# EAGLE board supply (EAGLE 9.6.1)
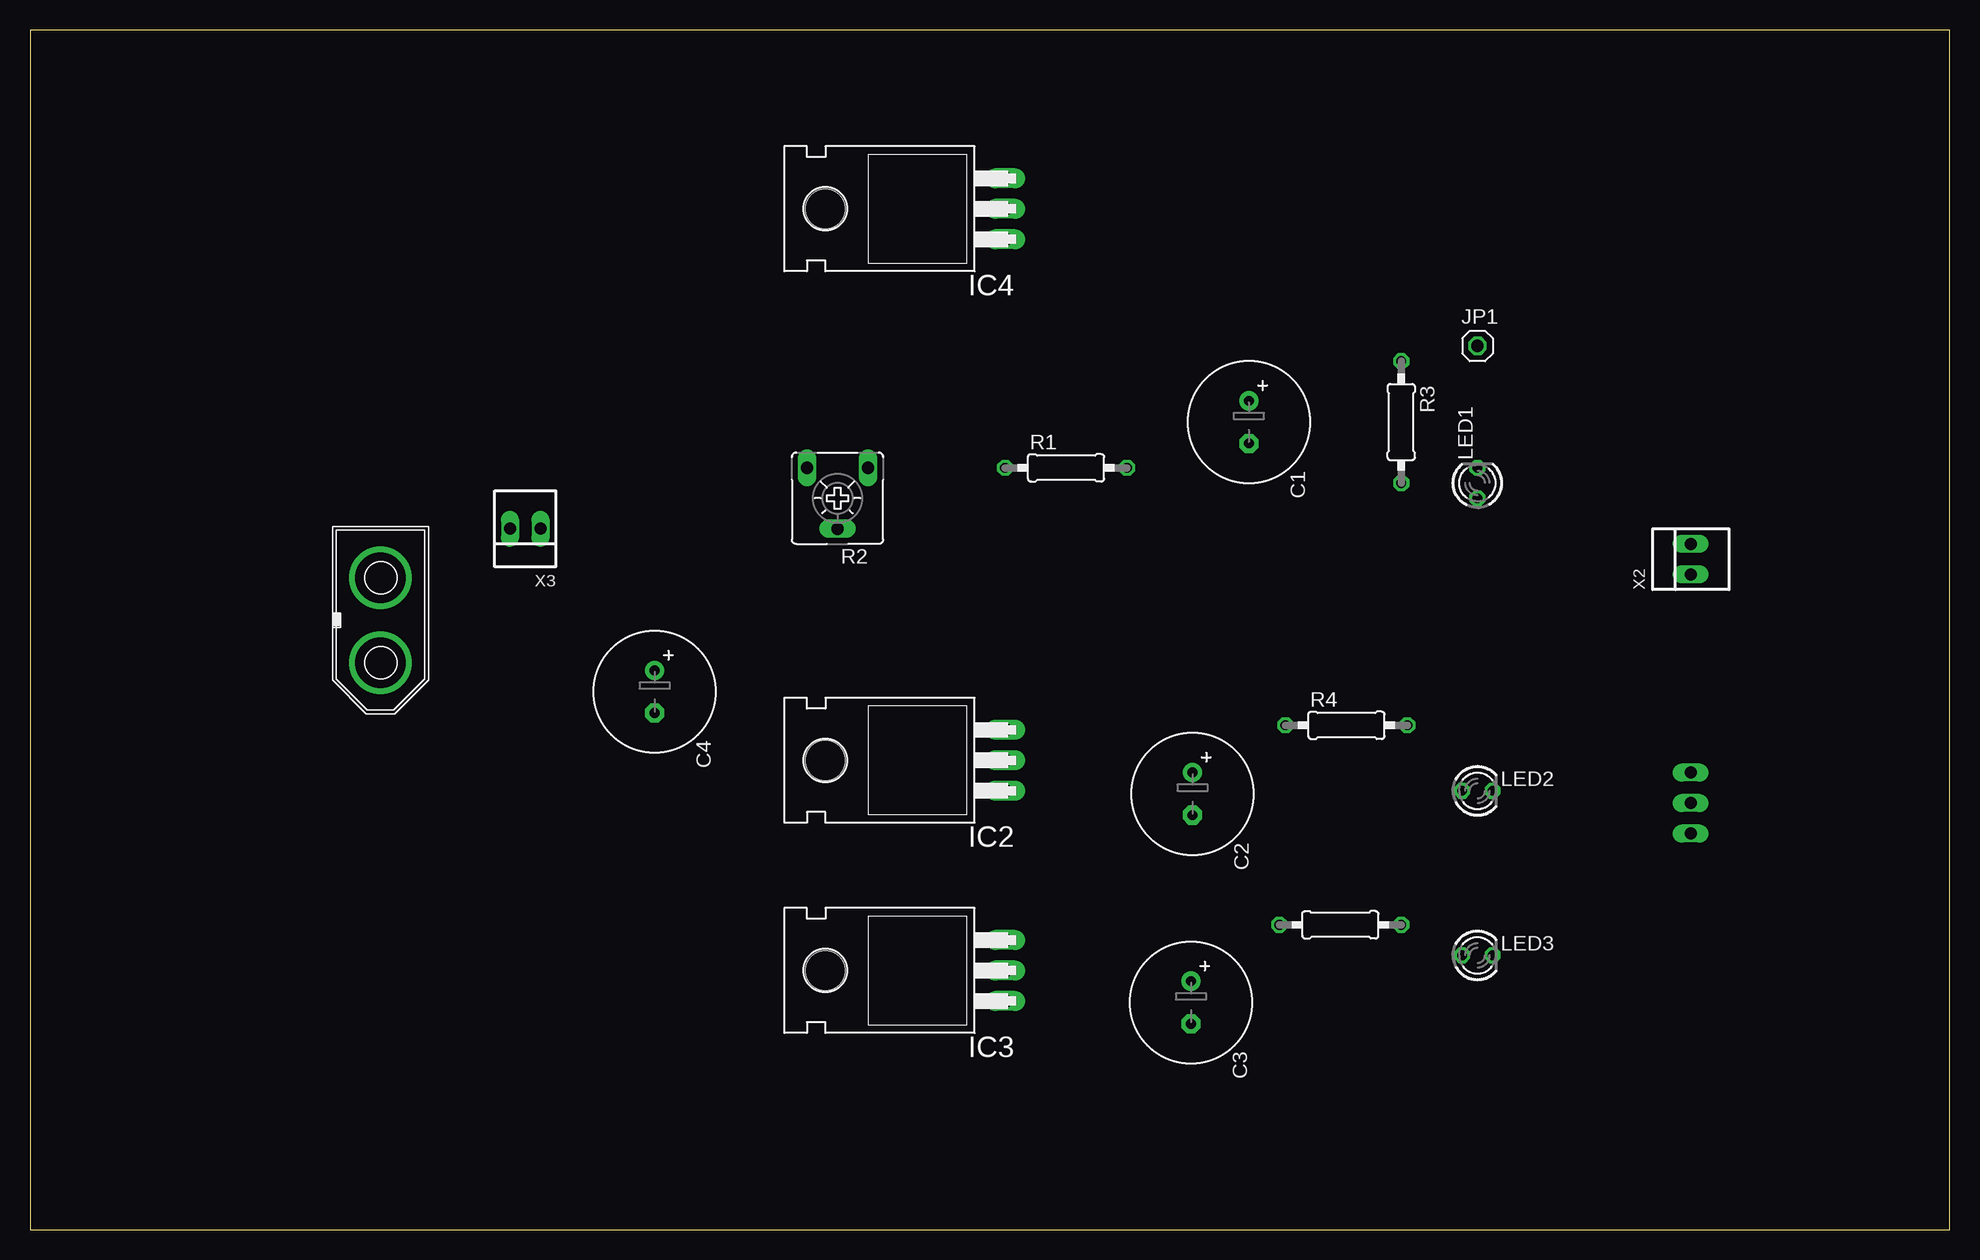
[diagram p0: board, top side]
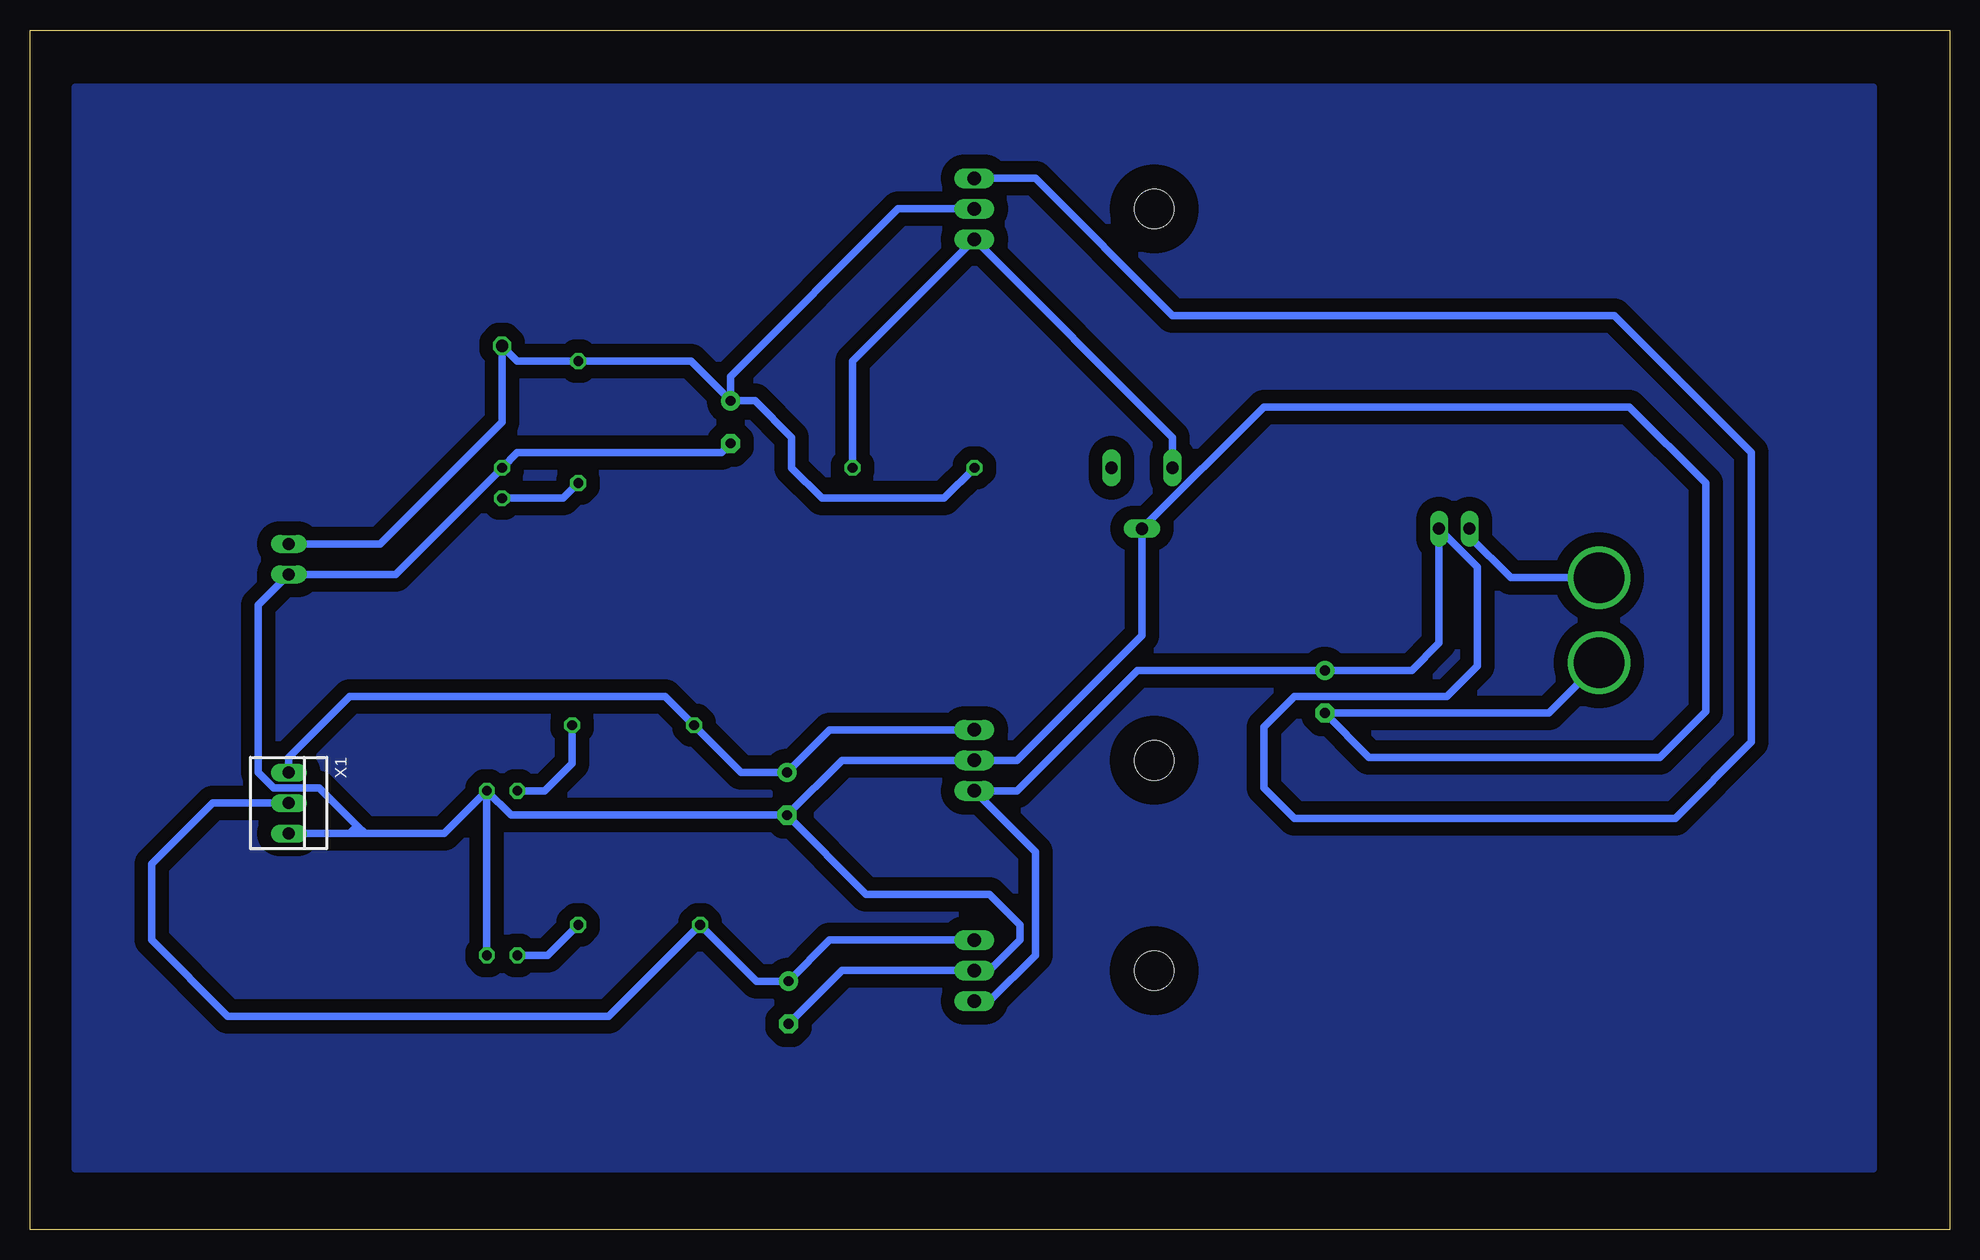
[diagram p1: board, bottom side, seen from below]

Size 160 x 100 mm. Coordinates in mm from the lower left corner, seen from the top.
Outline: 0,0 160,0 160,100 0,100 0,0
Copper layers (1*16): Top 0.035mm / dielectric 1.5mm / Bottom 0.035mm
Design rules "default": minimum track width 6mil, minimum drill 0.35mm, track to track 6mil, track to pad 6mil, pad to pad 6mil, via to via 6mil, smd to smd 6mil, copper to edge 40mil, drill to drill 6mil, minimum pad ring 10mil, minimum via ring 8mil, stop-mask expansion 4mil, vias tented up to drill 0mil, thermal gap 10mil

## Footprints (pad centres in the part's own frame; a part is rotated, then mirrored left to right if it is on the bottom)
E3,5-10 = drill 0.813 pad 1.6: + -1.778,0 | drill 0.813 pad 1.6 octagon: - 1.778,0
TO220H = drill 1.118 long: 1 -2.54,-10.16; 2 0,-10.16; 3 2.54,-10.16 | hole 3.302: 0,4.826
1X01 = drill 1.016 octagon: 1 0,0
LED3MM = drill 0.813 octagon: A -1.27,0; K 1.27,0
0207/10 = drill 0.813 octagon: 1 -5.08,0; 2 5.08,0
CA6V = drill 1.016 long: A -2.54,-2.54; E 2.54,-2.54; S 0,2.54
CON-XT60M = drill 4.2: V+ -3.55,0; V- 3.55,0
22-23-2031 = drill 1 long: 1 -2.54,0; 2 0,0; 3 2.54,0
22-23-2021 = drill 1 long: 1 -1.27,0; 2 1.27,0

## Placement (x,y rotation side)
C1  1000uF/16V  [E3,5-10]  101.6,67.31 270 top
C2  1000uF/16V  [E3,5-10]  96.9,36.32 270 top
C3  1000uF/16V  [E3,5-10]  96.77,18.92 270 top
C4  1000uF/16V  [E3,5-10]  52.07,44.83 270 top
IC2  7805T  [TO220H]  71.12,39.12 90 top
IC3  7805T  [TO220H]  71.12,21.59 90 top
IC4  317T  [TO220H]  71.12,85.09 90 top
JP1  [1X01]  120.65,73.66 0 top
LED1  [LED3MM]  120.65,62.23 90 top
LED2  [LED3MM]  120.65,36.58 0 top
LED3  [LED3MM]  120.65,22.86 0 top
R1  1K2  [0207/10]  86.36,63.5 0 top
R2  20K  [CA6V]  67.31,60.96 180 top
R3  1K  [0207/10]  114.3,67.31 270 top
R4  1K  [0207/10]  109.73,42.04 0 top
R5  1K  [0207/10]  109.22,25.4 0 top
VIN  [CON-XT60M]  29.21,50.8 270 top
X1  VSYS  [22-23-2031]  138.43,35.56 270 bottom
X2  VMOT  [22-23-2021]  138.43,55.88 90 top
X3  switch  [22-23-2021]  41.27,58.42 180 top

## Library data of the parts
C1-C4 R1 R3-R5 = rcl
IC2-IC4 = linear
JP1 = pinhead
LED1-LED3 = led
R2 = pot
VIN = con-XT60M
X1 = con-molex; MF: MOLEX; MPN: 22-23-2031; OC_FARNELL: 1462950; OC_NEWARK: 30C0862
X2 X3 = con-molex; MF: MOLEX; MPN: 22-23-2021; OC_FARNELL: 1462926; OC_NEWARK: 25C3832

## Nets
+12V: C3.+ IC3.3 R5.1 X1.2
GND: C1.- C2.- C3.- C4.- IC2.2 IC3.2 LED1.K LED2.K LED3.K R2.S VIN.V- X1.3 X2.1
N$1: IC4.1 R1.2 R2.E
N$2: LED1.A R3.2
N$3: LED3.A R5.2
N$4: VIN.V+ X3.2
N$5: LED2.A R4.2
VCC: C2.+ IC2.3 R4.1 X1.1
VDD: C1.+ IC4.2 JP1.1 R1.1 R3.1 X2.2
VPP: C4.+ IC2.1 IC3.1 IC4.3 X3.1

## Tracks (layer width: path | path; a pad name or v marks a point on that pad's centre or on a via)
+12V
  Bottom 0.61: IC3.3 93.34,24.13 C3.+ 99.44,20.7 R5.1 111.76,17.78 143.51,17.78 149.86,24.13 149.86,30.48 144.78,35.56 X1.2
GND
  Bottom 0.61: VIN.V- 33.41,43.05 C4.- 48.39,39.37 24.13,39.37 20.32,43.18 20.32,62.23 26.67,68.58 57.15,68.58 R2.S 67.31,49.53 77.72,39.12 IC2.2 92.33,39.12 C2.- | C1.- 102.36,64.77 119.38,64.77 LED1.K 129.54,54.61 X2.1 140.97,52.07 140.97,38.1 139.7,36.83 135.89,36.83 133.35,34.29 132.72,33.66 | C3.- 92.33,21.59 IC3.2 80.01,21.59 77.47,24.13 77.47,25.4 80.01,27.94 90.3,27.94 C2.- | C2.- 119.89,34.54 LED2.K | LED2.K 125.48,33.02 132.08,33.02 | 132.08,33.02 133.35,33.02 | 133.35,33.02 X1.3 | LED2.K LED3.K | 132.72,33.66 132.08,33.02 | 132.72,33.66 133.35,33.02
N$1
  Bottom 0.61: R1.2 91.44,72.39 IC4.1 64.77,66.04 R2.E
N$2
  Bottom 0.61: R3.2 115.57,60.96 LED1.A
N$3
  Bottom 0.61: R5.2 116.84,22.86 LED3.A
N$4
  Bottom 0.61: VIN.V+ 36.57,54.35 40.01,57.78 X3.2
N$5
  Bottom 0.61: R4.2 114.81,40.64 114.81,40.13 114.81,38.86 117.09,36.58 LED2.A
SUPPLY
  pour Bottom (isolate 1.143): 6.35,95.25 6.35,5.08 156.21,5.08 156.21,95.25
VCC
  Bottom 0.61: IC2.3 93.34,41.66 C2.+ 100.71,38.1 R4.1 107.06,44.45 133.35,44.45 138.43,39.37 X1.1
VDD
  Bottom 0.61: IC4.2 87.63,85.09 101.6,71.12 C1.+ | R1.1 83.82,60.96 93.98,60.96 96.52,63.5 96.52,66.04 99.57,69.09 C1.+ | C1.+ 104.9,72.39 R3.1 119.38,72.39 JP1.1 120.65,67.31 130.81,57.15 X2.2
VPP
  Bottom 0.61: IC3.1 80.01,19.05 76.2,22.86 76.2,31.5 IC2.1 77.72,36.58 67.69,46.61 C4.+ 44.83,46.61 42.55,48.9 X3.1 39.37,55.24 39.37,46.99 41.91,44.45 54.61,44.45 57.15,41.91 57.15,36.83 54.61,34.29 22.86,34.29 16.51,40.64 16.51,64.77 27.94,76.2 64.77,76.2 76.2,87.63 IC4.3